# Altium PCB общая плата.PcbDoc
Units mm, origin at the board's own origin, x right, y up, seen from the top; angles counter-clockwise.
Board outline 100 x 50 mm, 2 copper layers (Top Layer, Bottom Layer); 9 components, 4 nets, 143 pads, 0 vias.
Unrouted connection lines stored in the file: 9.
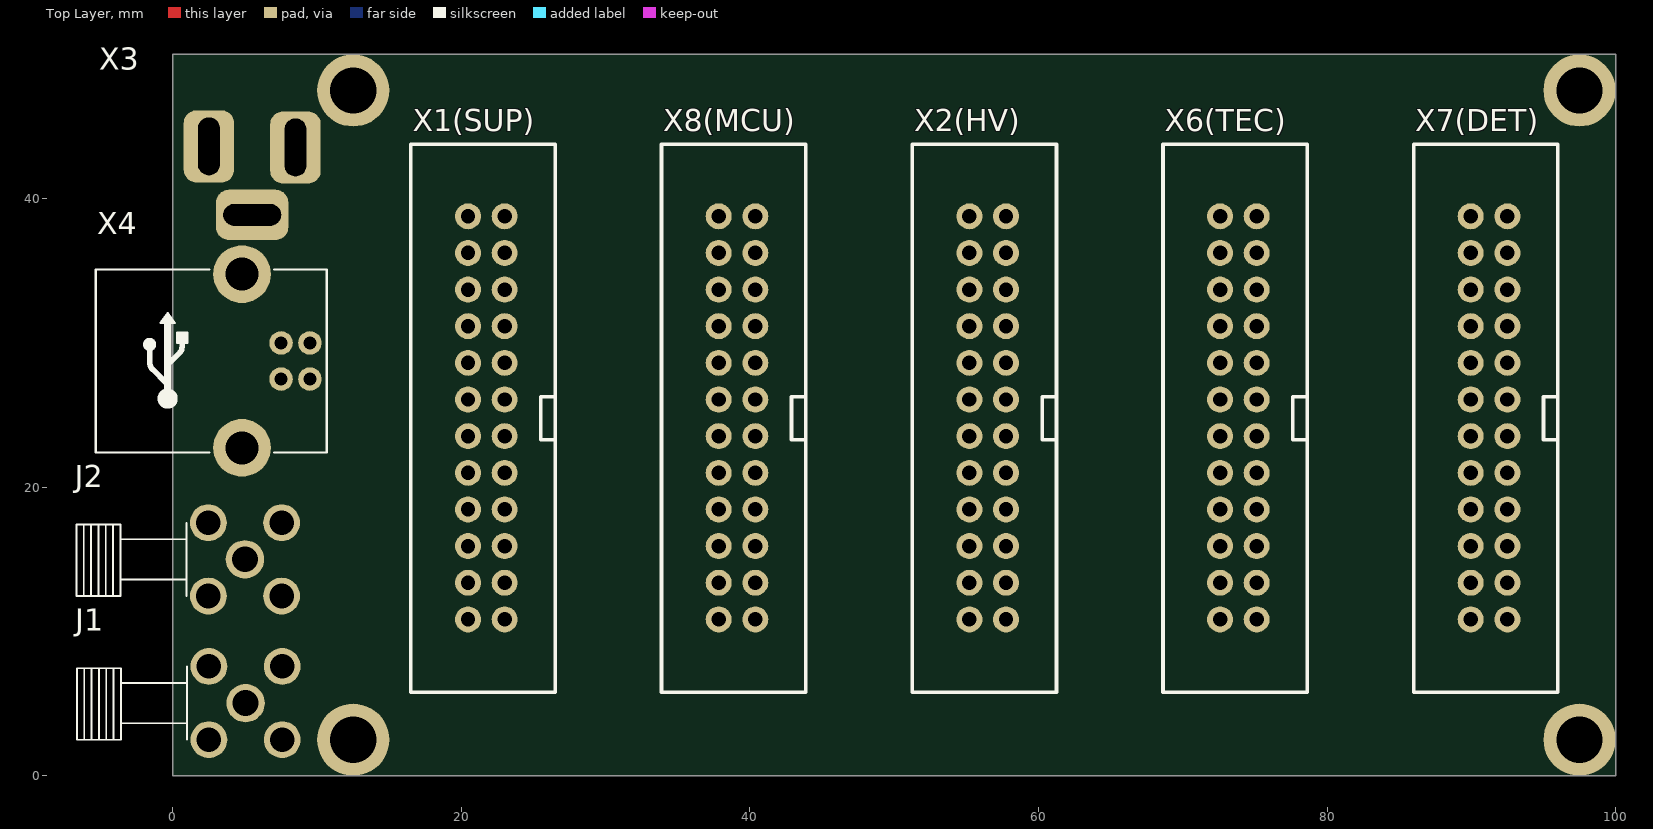
[diagram p0: Top Layer view]
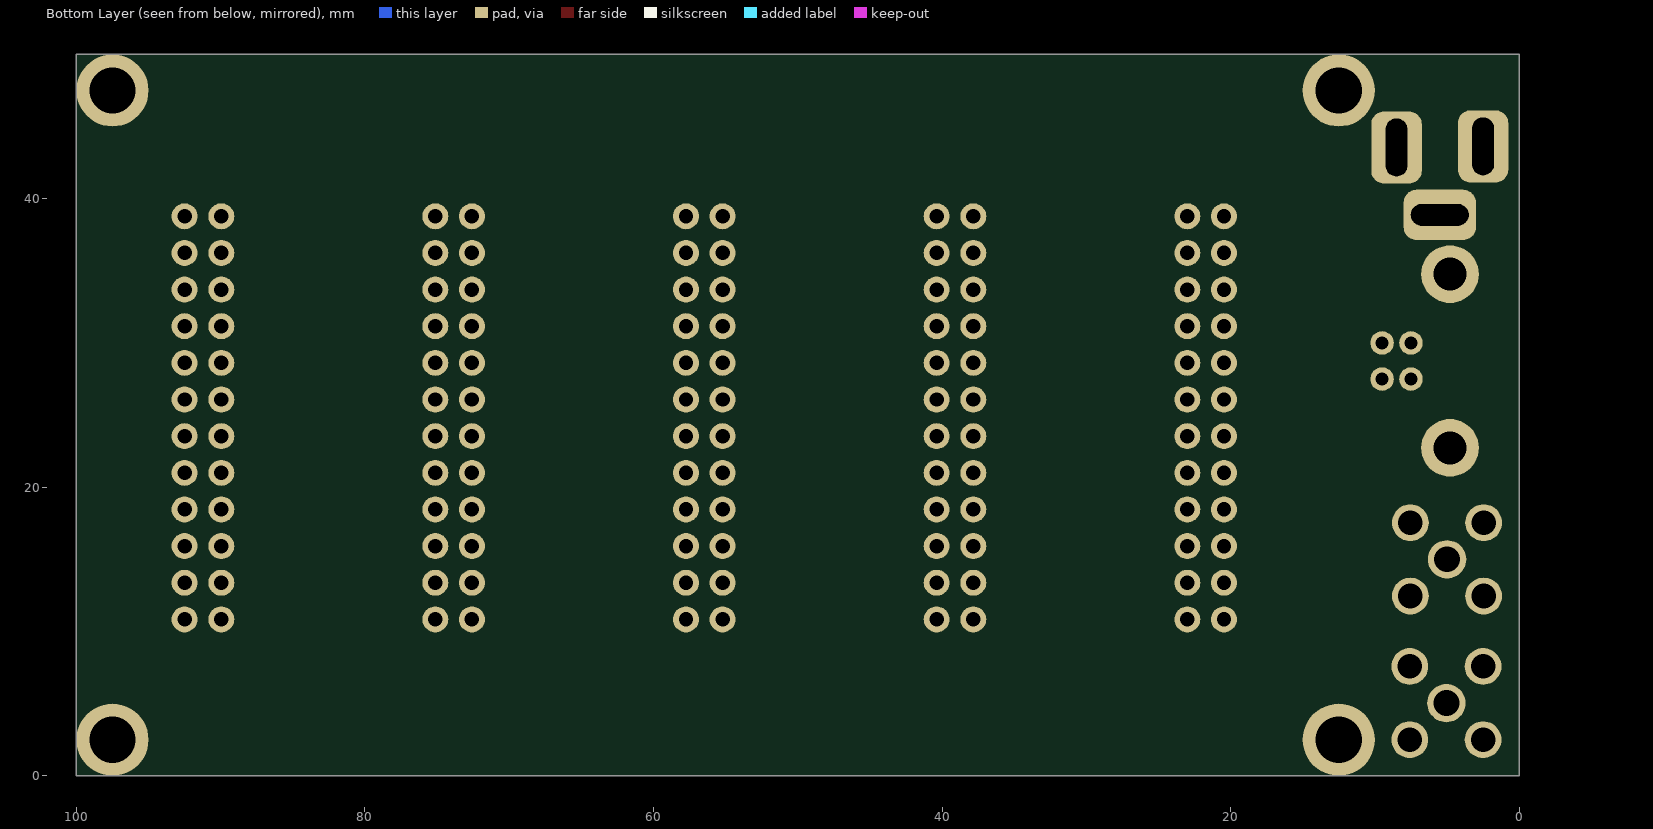
[diagram p1: Bottom Layer view, seen from below]

## Layer stack, top to bottom
Top Solder: solder mask 0.0102, Solder Resist, Dk 3.5
Top Layer: signal copper 0.0356
Dielectric 1: dielectric 0.32, FR-4, Dk 4.8
Bottom Layer: signal copper 0.0356
Bottom Solder: solder mask 0.0102, Solder Resist, Dk 3.5

## Board outline
0,0 0,50 100,50 100,0

## Design rules (kind name [scope] priority, off if disabled: settings)
Clearance [All] p1: gap=0.254
PolygonConnect [All] p1: connectstyle=Relief reliefconductorwidth=0.254 reliefentries=4 polygonreliefangle="90 Angle" airgapwidth=0.254
RoutingVias [All] p1: holewidth=0.711 width=1.27 viastyle="Through Hole" minholewidth=0.711 minwidth=1.27 maxholewidth=0.711 maxwidth=1.27
SolderMaskExpansion [All] p1: expansion=0.102
Width [All] p1: maxlimit=0.254 minlimit=0.254 preferedwidth=0.254
30 further rules are at their usual default settings.

## Components (designator, comment, footprint, x,y, rotation, side; value= is the part's Value field where it differs from the comment)
J1 "221790-1" TE_221790-1 5.04,5.04 r180 top
J2 "221790-1" TE_221790-1 5,15 r180 top
X1(SUP) "24pin_conn" BH-24 23,38.78 r180 top (schematic designator X1)
X2(HV) "24pin_conn" BH-24 57.75,38.78 r180 top (schematic designator X2)
X3 "Model" DC210 0.25,47.876 r270 top
X4 "Model" USB_TypeB 8.505,28.75 r90 top
X6(TEC) "24pin_conn" BH-24 75.125,38.78 r180 top (schematic designator X6)
X7(DET) "24pin_conn" BH-24 92.5,38.78 r180 top (schematic designator X7)
X8(MCU) "24pin_conn" BH-24 40.375,38.78 r180 top (schematic designator X8)

## Footprints (in the part's own frame and the unit in brackets; to place one, negate y for a bottom-side part, rotate by r counter-clockwise, add the part's x,y. Pads: shape width x height; smd on the part's side, far side on the other; paste and mask are expansions set on the pad)
BH-24 [mm]
  round 1.8 hole 1 unplated mask+0.102: 1(0,27.94) 2(0,25.4) 3(0,22.86) 4(0,20.32) 5(0,17.78) 6(0,15.24) 7(0,12.7) 8(0,10.16) 9(0,7.62) 10(0,5.08) 11(0,2.54) 12(0,0) 13(2.54,0) 14(2.54,2.54) 15(2.54,5.08) 16(2.54,7.62) 17(2.54,10.16) 18(2.54,12.7) 19(2.54,15.24) 20(2.54,17.78) 21(2.54,20.32) 22(2.54,22.86) 23(2.54,25.4) 24(2.54,27.94)
  silkscreen extent -3.5,-5 6.5,33, body extent -3.26,-5.04 6.34,33.04, height 9.1
DC210 [mm]
  rrect50% 5x3.5 hole 1.5 slot 4 at 0 deg: 1(4.325,8.25) 2(4.25,2.25)
  rrect50% 3.5x5 hole 1.5 slot 4 at 90 deg: 3(9,5.25)
  body extent -0.28,-5.6 9.27,8.9, height 11.5
TE_221790-1 [mil]
  round 105 hole 70: 1(0,0)
  round 100.5 hole 67: 2(-100,100) 3(100,100) 4(-100,-100) 5(100,-100)
  silkscreen extent 160,-100 460,100
USB_TypeB [mm]
  round 1.626 hole 0.914 mask+0.025: 1(-1.25,-0.995) 2(1.25,-0.995) 3(1.25,1.005) 4(-1.25,1.005)
  round 4 hole 2.3 mask+0: 4(-6.02,3.715) 4(6.02,3.715)
  silkscreen extent -6.35,-2.16 6.35,13.84, body extent -7.19,-1.7 7.19,14, height 11.5

## Part data
J1 J2: "Connector; SMA; PCB; Right Angle; Stainless Steel; 0.6 in.; Beryllium Copper"
X3: library part "Connector 3"
X4: library part "Connector 5"

## Free pads (board coordinates)
  round 5 hole 3.2: 0(12.5,2.5) 1(12.5,47.5) 2(97.5,47.5) 3(97.5,2.5)

## Nets (pads, with @x,y where several pads share a name; then routed paths per layer and width w, separated by ;. In a path a pad name is that pad's centre, name@x,y a point inside that pad or via, vN(x,y) a via of type N, cw(c..) or ccw(c..) an arc to the next point about the centre after c; other vN are vias at no path point)
+12V: X3.1
GND: J1.2 J1.3 J1.4 J1.5 J2.2 J2.3 J2.4 J2.5 X3.2 X3.3
"SIG OUT": J2.1
STOP: J1.1
pads on no net: X1(SUP).1 X1(SUP).2 X1(SUP).3 X1(SUP).4 X1(SUP).5 X1(SUP).6 X1(SUP).7 X1(SUP).8 X1(SUP).9 X1(SUP).10 X1(SUP).11 X1(SUP).12 X1(SUP).13 X1(SUP).14 X1(SUP).15 X1(SUP).16 X1(SUP).17 X1(SUP).18 X1(SUP).19 X1(SUP).20 X1(SUP).21 X1(SUP).22 X1(SUP).23 X1(SUP).24 X2(HV).1 X2(HV).2 X2(HV).3 X2(HV).4 X2(HV).5 X2(HV).6 X2(HV).7 X2(HV).8 X2(HV).9 X2(HV).10 X2(HV).11 X2(HV).12 X2(HV).13 X2(HV).14 X2(HV).15 X2(HV).16 X2(HV).17 X2(HV).18 X2(HV).19 X2(HV).20 X2(HV).21 X2(HV).22 X2(HV).23 X2(HV).24 X4.1 X4.2 X4.3 X4.4 X6(TEC).1 X6(TEC).2 X6(TEC).3 X6(TEC).4 X6(TEC).5 X6(TEC).6 X6(TEC).7 X6(TEC).8 X6(TEC).9 X6(TEC).10 X6(TEC).11 X6(TEC).12 X6(TEC).13 X6(TEC).14 X6(TEC).15 X6(TEC).16 X6(TEC).17 X6(TEC).18 X6(TEC).19 X6(TEC).20 X6(TEC).21 X6(TEC).22 X6(TEC).23 X6(TEC).24 X7(DET).1 X7(DET).2 X7(DET).3 X7(DET).4 X7(DET).5 X7(DET).6 X7(DET).7 X7(DET).8 X7(DET).9 X7(DET).10 X7(DET).11 X7(DET).12 X7(DET).13 X7(DET).14 X7(DET).15 X7(DET).16 X7(DET).17 X7(DET).18 X7(DET).19 X7(DET).20 X7(DET).21 X7(DET).22 X7(DET).23 X7(DET).24 X8(MCU).1 X8(MCU).2 X8(MCU).3 X8(MCU).4 X8(MCU).5 X8(MCU).6 X8(MCU).7 X8(MCU).8 X8(MCU).9 X8(MCU).10 X8(MCU).11 X8(MCU).12 X8(MCU).13 X8(MCU).14 X8(MCU).15 X8(MCU).16 X8(MCU).17 X8(MCU).18 X8(MCU).19 X8(MCU).20 X8(MCU).21 X8(MCU).22 X8(MCU).23 X8(MCU).24

## Silkscreen, mask and mechanical layers (free items; w line width, h text height)
Mechanical 14:
  the board outline again, w0.254